# EAGLE board ARC Lighting v1.2 (EAGLE 6.5.0)
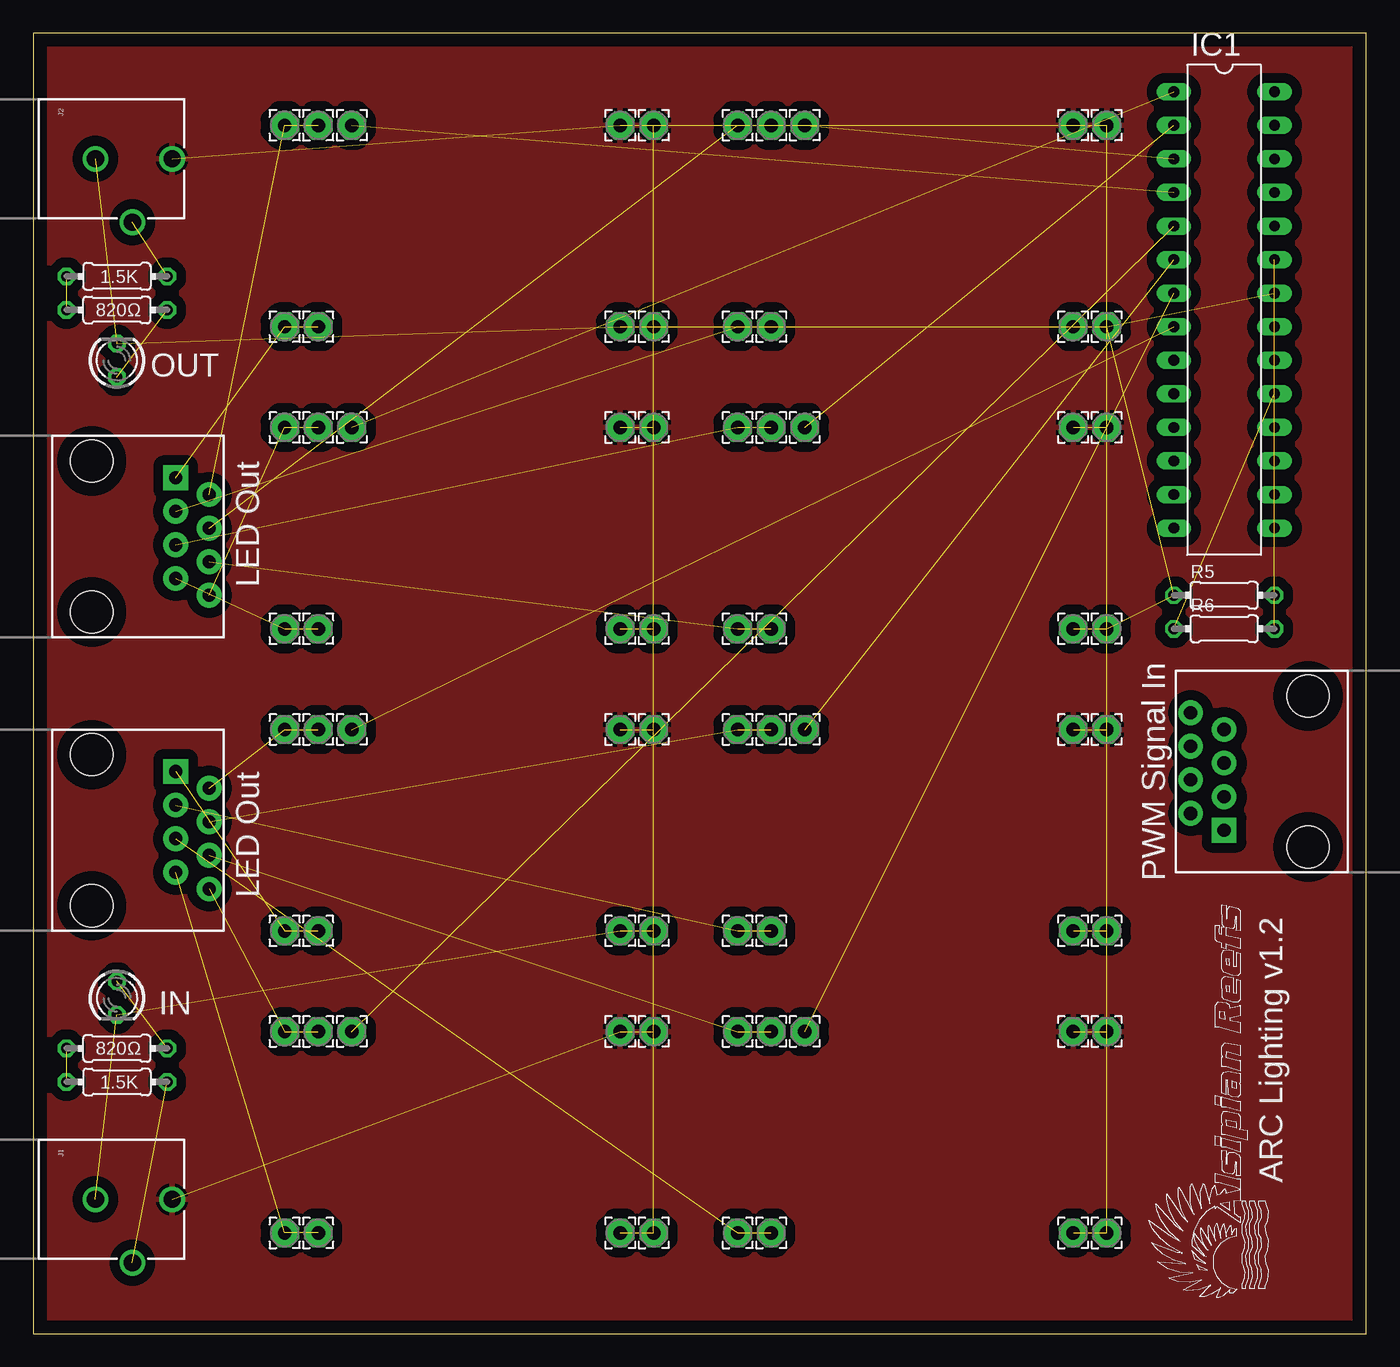
[diagram p0: board, top side]
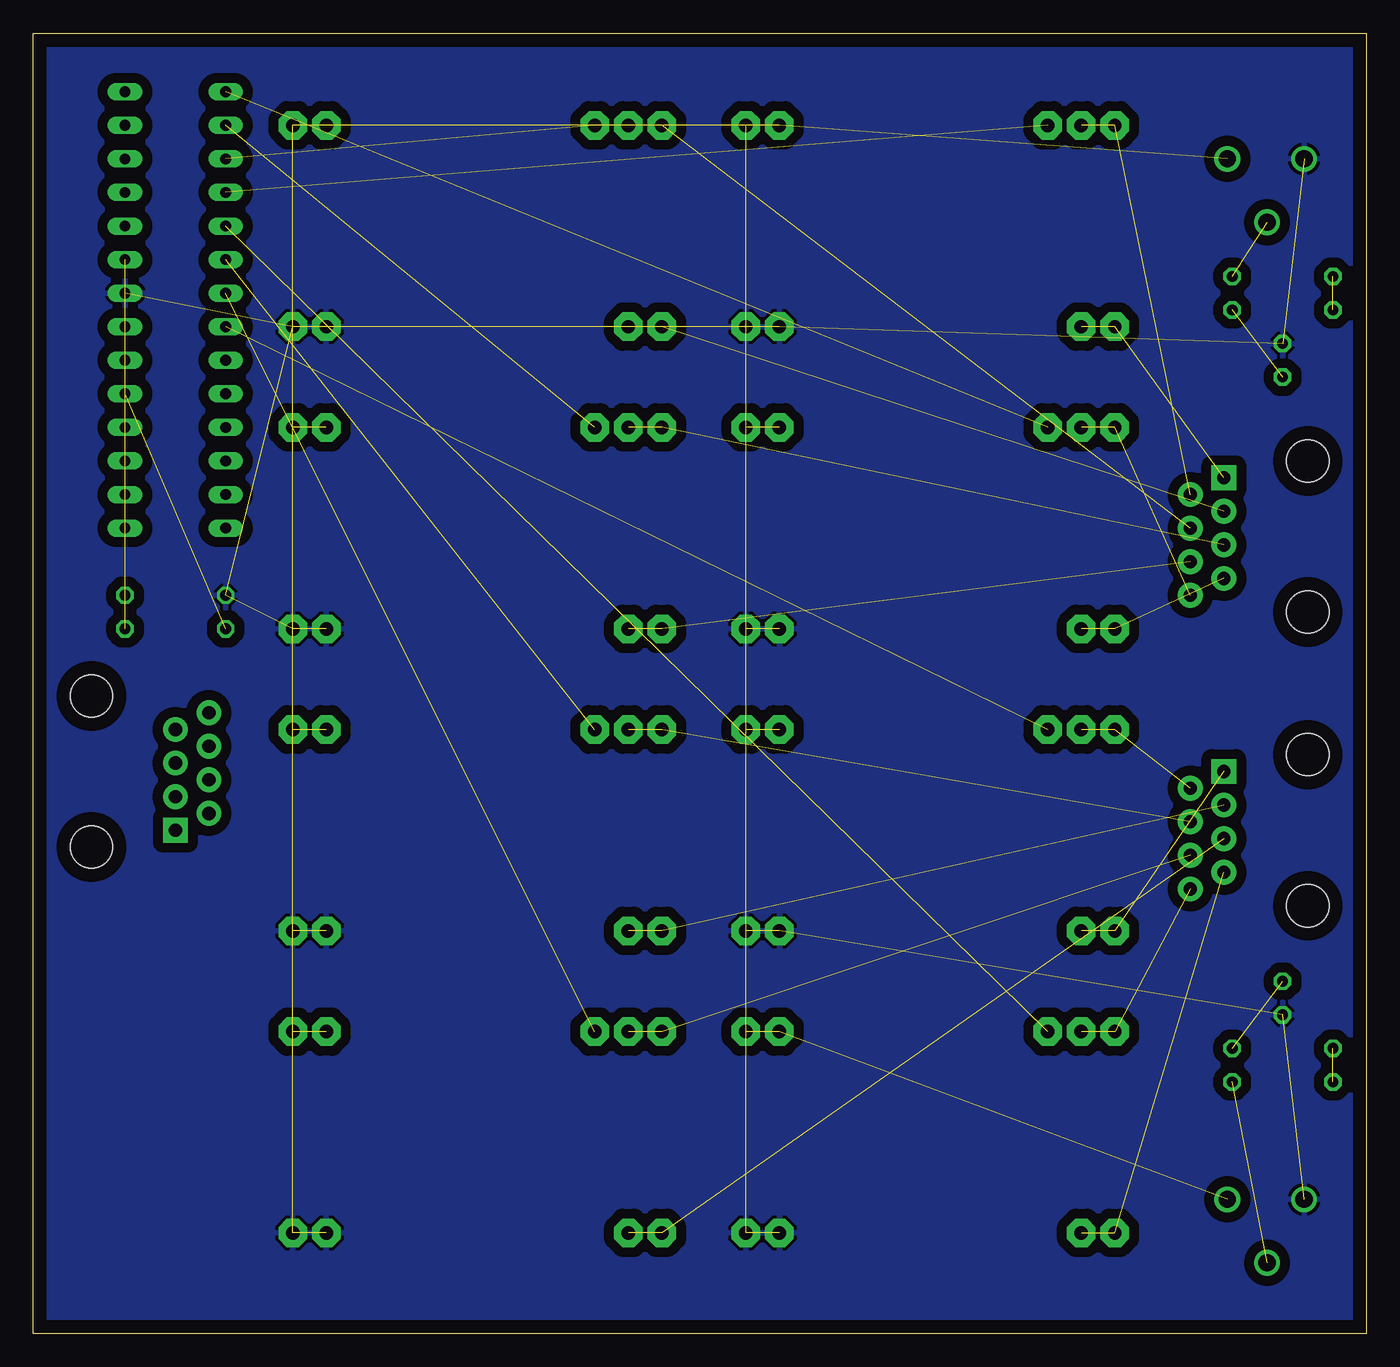
[diagram p1: board, bottom side, seen from below]

Size 100.94 x 98.42 mm. Coordinates in mm from the lower left corner, seen from the top.
Outline: 0,0 100.94,0 100.94,98.42 0,98.42 0,0
Copper layers (1*16): Top 0.035mm / dielectric 1.5mm / Bottom 0.035mm
Design rules "default": minimum track width 10mil, minimum drill 24mil, track to track 8mil, track to pad 8mil, pad to pad 8mil, via to via 8mil, smd to smd 8mil, copper to edge 40mil, drill to drill 8mil, minimum pad ring 10mil, minimum via ring 8mil, stop-mask expansion 4mil, vias tented up to drill 0mil, thermal gap 10mil
Net classes: 0 default: width 0.178 mm, drill 0.356 mm, clearance 0.508 mm; 1 8A: width 5.283 mm, drill 0.356 mm, clearance 0.508 mm; 2 1A: width 0.356 mm, drill 0.356 mm, clearance 0.508 mm; 4 1.5A: width 0.889 mm, clearance 0.762 mm

## Footprints (pad centres in the part's own frame; a part is rotated, then mirrored left to right if it is on the bottom)
2,15/1,0 = drill 1.016 pad 2.159 octagon: 1 0,0
DIP28 = drill 0.813 long: 1 -15.24,-3.81; 2 -12.7,-3.81; 3 -10.16,-3.81; 4 -7.62,-3.81; 5 -5.08,-3.81; 6 -2.54,-3.81; 7 0,-3.81; 8 2.54,-3.81; 9 5.08,-3.81; 10 7.62,-3.81; 11 10.16,-3.81; 12 12.7,-3.81; 13 15.24,-3.81; 14 17.78,-3.81; 15 17.78,3.81; 16 15.24,3.81; 17 12.7,3.81; 18 10.16,3.81; 19 7.62,3.81; 20 5.08,3.81; 21 2.54,3.81; 22 0,3.81; 23 -2.54,3.81; 24 -5.08,3.81; 25 -7.62,3.81; 26 -10.16,3.81; 27 -12.7,3.81; 28 -15.24,3.81
POWER_JACK_PTH_BREAD = drill 1.3: GND 0,7.9; GNDBREAK 4.8,10.7; PWR 0,13.7
LED3MM = drill 0.813 octagon: A -1.27,0; K 1.27,0
0204/7 = drill 0.813 octagon: 1 -3.81,0; 2 3.81,0
RJ45-8 = drill 1 pad 1.88 square: 1 -4.445,6.35 | drill 1 pad 1.88: 2 -3.175,8.89; 3 -1.905,6.35; 4 -0.635,8.89; 5 0.635,6.35; 6 1.905,8.89; 7 3.175,6.35; 8 4.445,8.89 | hole 3.2: -5.715,0; 5.715,0

## Placement (x,y rotation side)
DIM0  [2,15/1,0]  24.13,68.58 0 top
DIM1  [2,15/1,0]  58.42,68.58 0 top
DIM2  [2,15/1,0]  58.42,91.44 0 top
DIM3  [2,15/1,0]  24.13,91.44 0 top
DIM4  [2,15/1,0]  24.13,22.86 0 top
DIM5  [2,15/1,0]  58.42,45.72 0 top
DIM6  [2,15/1,0]  58.42,22.86 0 top
DIM7  [2,15/1,0]  24.13,45.72 0 top
I+0  [2,15/1,0]  46.99,68.58 0 top
I+1  [2,15/1,0]  81.28,68.58 0 top
I+2  [2,15/1,0]  81.28,91.44 0 top
I+3  [2,15/1,0]  46.99,91.44 0 top
I+4  [2,15/1,0]  46.99,22.86 0 top
I+5  [2,15/1,0]  81.28,45.72 0 top
I+6  [2,15/1,0]  81.28,22.86 0 top
I+7  [2,15/1,0]  46.99,45.72 0 top
I-0  [2,15/1,0]  46.99,53.34 0 top
I-1  [2,15/1,0]  81.28,53.34 0 top
I-2  [2,15/1,0]  81.28,76.2 0 top
I-3  [2,15/1,0]  46.99,76.2 0 top
I-4  [2,15/1,0]  46.99,7.62 0 top
I-5  [2,15/1,0]  81.28,30.48 0 top
I-6  [2,15/1,0]  81.28,7.62 0 top
I-7  [2,15/1,0]  46.99,30.48 0 top
IC1  [DIP28]  90.17,78.74 270 top
J1  Power  [POWER_JACK_PTH_BREAD]  -3.17,10.16 270 top
J2  Power  [POWER_JACK_PTH_BREAD]  -3.17,88.9 270 top
LED1  [LED3MM]  6.35,25.4 270 top
LED2  [LED3MM]  6.35,73.66 90 top
O+0  [2,15/1,0]  21.59,68.58 0 top
O+1  [2,15/1,0]  55.88,68.58 0 top
O+2  [2,15/1,0]  55.88,91.44 0 top
O+3  [2,15/1,0]  21.59,91.44 0 top
O+4  [2,15/1,0]  21.59,22.86 0 top
O+5  [2,15/1,0]  55.88,45.72 0 top
O+6  [2,15/1,0]  55.88,22.86 0 top
O+7  [2,15/1,0]  21.59,45.72 0 top
O-0  [2,15/1,0]  21.59,53.34 0 top
O-1  [2,15/1,0]  55.88,53.34 0 top
O-2  [2,15/1,0]  55.88,76.2 0 top
O-3  [2,15/1,0]  21.59,76.2 0 top
O-4  [2,15/1,0]  21.59,7.62 0 top
O-5  [2,15/1,0]  55.88,30.48 0 top
O-6  [2,15/1,0]  55.88,7.62 0 top
O-7  [2,15/1,0]  21.59,30.48 0 top
R1  1.5K  [0204/7]  6.35,80.01 180 top
R2  820Ω  [0204/7]  6.35,77.47 0 top
R3  1.5K  [0204/7]  6.35,19.05 180 top
R4  820Ω  [0204/7]  6.35,21.59 0 top
R5  820Ω  [0204/7]  90.17,55.88 0 top
R6  820Ω  [0204/7]  90.17,53.34 0 top
U$1  RJ45-8PTH  [RJ45-8]  4.45,38.1 270 top
U$2  RJ45-8PTH  [RJ45-8]  4.45,60.33 270 top
U$3  RJ45-8PTH  [RJ45-8]  96.52,42.55 90 top
VIN+0  [2,15/1,0]  44.45,68.58 0 top
VIN+1  [2,15/1,0]  78.74,68.58 0 top
VIN+2  [2,15/1,0]  78.74,91.44 0 top
VIN+3  [2,15/1,0]  44.45,91.44 0 top
VIN+4  [2,15/1,0]  44.45,22.86 0 top
VIN+5  [2,15/1,0]  78.74,45.72 0 top
VIN+6  [2,15/1,0]  78.74,22.86 0 top
VIN+7  [2,15/1,0]  44.45,45.72 0 top
VIN-0  [2,15/1,0]  44.45,53.34 0 top
VIN-1  [2,15/1,0]  78.74,53.34 0 top
VIN-2  [2,15/1,0]  78.74,76.2 0 top
VIN-3  [2,15/1,0]  44.45,76.2 0 top
VIN-4  [2,15/1,0]  44.45,7.62 0 top
VIN-5  [2,15/1,0]  78.74,30.48 0 top
VIN-6  [2,15/1,0]  78.74,7.62 0 top
VIN-7  [2,15/1,0]  44.45,30.48 0 top
VOUT+0  [2,15/1,0]  19.05,68.58 0 top
VOUT+1  [2,15/1,0]  53.34,68.58 0 top
VOUT+2  [2,15/1,0]  53.34,91.44 0 top
VOUT+3  [2,15/1,0]  19.05,91.44 0 top
VOUT+4  [2,15/1,0]  19.05,22.86 0 top
VOUT+5  [2,15/1,0]  53.34,45.72 0 top
VOUT+6  [2,15/1,0]  53.34,22.86 0 top
VOUT+7  [2,15/1,0]  19.05,45.72 0 top
VOUT-0  [2,15/1,0]  19.05,53.34 0 top
VOUT-1  [2,15/1,0]  53.34,53.34 0 top
VOUT-2  [2,15/1,0]  53.34,76.2 0 top
VOUT-3  [2,15/1,0]  19.05,76.2 0 top
VOUT-4  [2,15/1,0]  19.05,7.62 0 top
VOUT-5  [2,15/1,0]  53.34,30.48 0 top
VOUT-6  [2,15/1,0]  53.34,7.62 0 top
VOUT-7  [2,15/1,0]  19.05,30.48 0 top

## Library data of the parts
DIM0 DIM1-DIM7 I+0 I+1-I+7 I-0 I-1-I-7 O+0 O+1-O+7 O-0 O-1-O-7 VIN+0 VIN+1-VIN+7 VIN-0 VIN-1-VIN-7 VOUT+0 VOUT+1-VOUT+7 VOUT-0 VOUT-1-VOUT-7 = wirepad
IC1 = tcl5940
J1 J2 = SparkFun-Connectors; PROD_ID: PRT-10811
LED1 LED2 = led
R1-R6 = resistor
U$1-U$3 = SparkFun-Connectors

## Nets
5V [1.5A]: IC1.19 IC1.21 R6.1
12V [1.5A]: I+0.1 I+1.1 I+2.1 I+3.1 I+4.1 I+5.1 I+6.1 I+7.1 J1.PWR J2.PWR VIN+0.1 VIN+1.1 VIN+2.1 VIN+3.1 VIN+4.1 VIN+5.1 VIN+6.1 VIN+7.1
GND [1.5A]: I-0.1 I-1.1 I-2.1 I-3.1 I-4.1 I-5.1 I-6.1 I-7.1 IC1.22 J1.GND J2.GND LED1.K LED2.K R5.1 VIN-0.1 VIN-1.1 VIN-2.1 VIN-3.1 VIN-4.1 VIN-5.1 VIN-6.1 VIN-7.1
L1+ [1.5A]: O+1.1 U$2.5 VOUT+1.1
L2+ [1.5A]: O+2.1 U$2.4 VOUT+2.1
L2- [1.5A]: O-2.1 U$2.3 VOUT-2.1
L3+ [1.5A]: O+3.1 U$2.2 VOUT+3.1
L3- [1.5A]: O-3.1 U$2.1 VOUT-3.1
L4- [1.5A]: O-4.1 U$1.7 VOUT-4.1
L5+ [1.5A]: O+5.1 U$1.4 VOUT+5.1
L5- [1.5A]: O-5.1 U$1.3 VOUT-5.1
L6+ [1.5A]: O+6.1 U$1.6 VOUT+6.1
L6- [1.5A]: O-6.1 U$1.5 VOUT-6.1
L7+ [1.5A]: O+7.1 U$1.2 VOUT+7.1
L7- [1.5A]: O-7.1 U$1.1 VOUT-7.1
LED0 [1.5A]: DIM0.1 IC1.1
LED1 [1.5A]: DIM1.1 IC1.2
LED2 [1.5A]: DIM2.1 IC1.3
LED3 [1.5A]: DIM3.1 IC1.4
LED4 [1.5A]: DIM4.1 IC1.5
LED5 [1.5A]: DIM5.1 IC1.6
LED6 [1.5A]: DIM6.1 IC1.7
LED7 [1.5A]: DIM7.1 IC1.8
N$1 [1.5A]: J2.GNDBREAK R1.1
N$2 [1.5A]: R1.2 R2.1
N$3 [1.5A]: LED2.A R2.2
N$4 [1.5A]: J1.GNDBREAK R3.1
N$5 [1.5A]: R3.2 R4.1
N$6 [1.5A]: LED1.A R4.2
N$7 [1.5A]: IC1.23 R6.2
N$8 [1.5A]: IC1.24
N$9 [1.5A]: IC1.26
N$10 [1.5A]: IC1.25
N$11 [1.5A]: IC1.18
N$12 [1.5A]: IC1.20 R5.2
N$36 [1.5A]: O+4.1 U$1.8 VOUT+4.1
N$37 [1.5A]: O+0.1 U$2.8 VOUT+0.1
N$38 [1.5A]: O-0.1 U$2.7 VOUT-0.1
N$39 [1.5A]: O-1.1 U$2.6 VOUT-1.1

## Tracks (layer width: path | path; a pad name or v marks a point on that pad's centre or on a via)
5V  (2 unrouted)
12V  (17 unrouted)
  pour Top: 0,98.42 100.97,98.42 100.97,0 0,0
GND  (21 unrouted)
  pour Bottom: 0,98.42 100.97,98.42 100.97,0 0,0
L1+  (2 unrouted)
L2+  (2 unrouted)
L2-  (2 unrouted)
L3+  (2 unrouted)
L3-  (2 unrouted)
L4-  (2 unrouted)
L5+  (2 unrouted)
L5-  (2 unrouted)
L6+  (2 unrouted)
L6-  (2 unrouted)
L7+  (2 unrouted)
L7-  (2 unrouted)
LED0  (1 unrouted)
LED1  (1 unrouted)
LED2  (1 unrouted)
LED3  (1 unrouted)
LED4  (1 unrouted)
LED5  (1 unrouted)
LED6  (1 unrouted)
LED7  (1 unrouted)
N$1  (1 unrouted)
N$2  (1 unrouted)
N$3  (1 unrouted)
N$4  (1 unrouted)
N$5  (1 unrouted)
N$6  (1 unrouted)
N$7  (1 unrouted)
N$12  (1 unrouted)
N$36  (2 unrouted)
N$37  (2 unrouted)
N$38  (2 unrouted)
N$39  (2 unrouted)

## Text on the board
tPlace: OUT | LED Out | PWM Signal In | LED Out | IN | ARC Lighting v1.2